# Altium PCB PCB_CONTROL.PcbDoc (part 3 of 15)
Units mil, origin at the board's own origin, x right, y up, seen from the top; angles counter-clockwise.
Board outline 7360.03 x 4773.15 mil, 2 copper layers (Top Layer, Bottom Layer); 73 components, 135 nets, 396 pads, 106 vias.
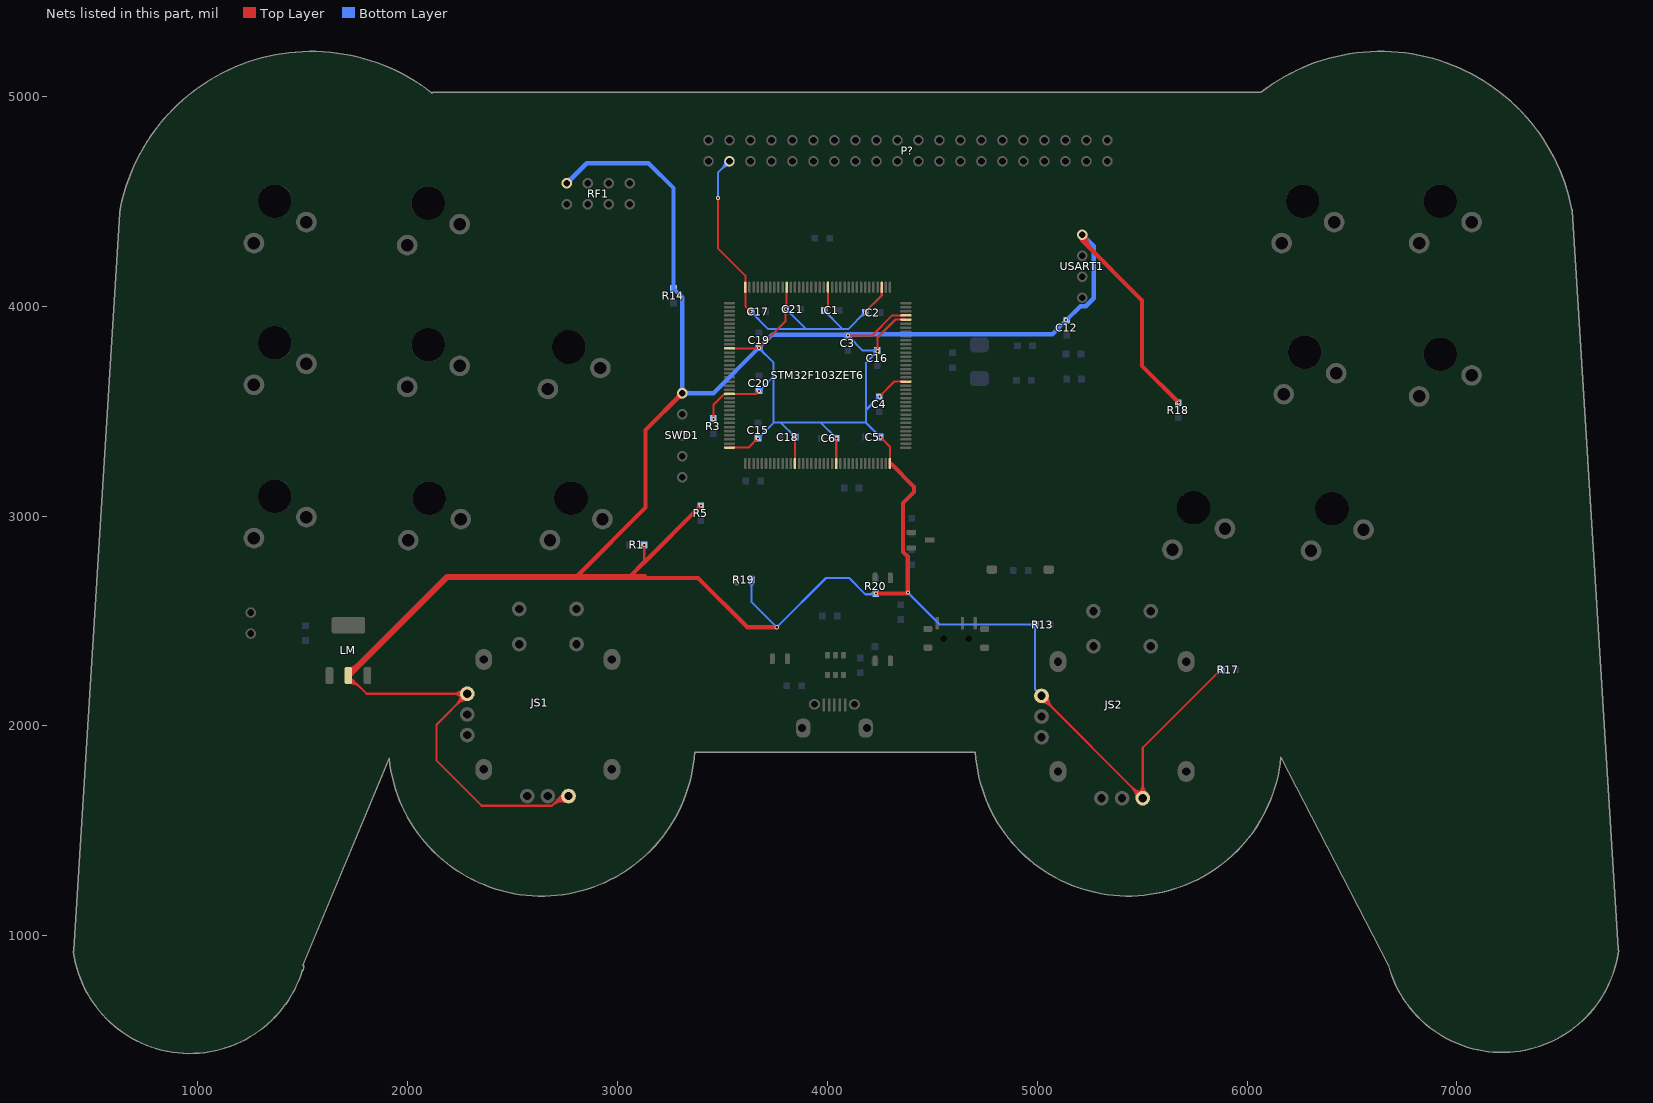
[diagram p3: the nets of this part, all layers, seen from the top]

## Via types
v1: diameter 20, hole 10, Top Layer to Bottom Layer, 104 vias
v2: diameter 30, hole 20, Top Layer to Bottom Layer, 2 vias

## Nets (pads, with @x,y where several pads share a name; then routed paths per layer and width w, separated by ;. In a path a pad name is that pad's centre, name@x,y a point inside that pad or via, vN(x,y) a via of type N, cw(c..) or ccw(c..) an arc to the next point about the centre after c; other vN are vias at no path point) (continued)
3V3: (continued)
  Bottom Layer w10: 4165.34,3955.34 ccw(c4151.69,3969) C2.1@4171,3969 ; C2.1@4170.01,3965.29 cw(c4183.65,3961.64) C2.1@4178,3974.58 ; C2.1@4170.01,3965.29 cw(c4183.65,3961.64) C2.1@4178,3974.58 ; C2.1@4170.01,3965.29 cw(c4183.65,3961.64) C2.1@4178,3974.58 ; C2.1@4170.01,3965.29 cw(c4183.65,3961.64) C2.1@4178,3974.58 ; C2.1@4170.01,3965.29 cw(c4183.65,3961.64) C2.1@4178,3974.58 ; C2.1@4170.01,3965.29 cw(c4183.65,3961.64) C2.1@4178,3974.58 ; C2.1@4170.01,3965.29 cw(c4183.65,3961.64) C2.1@4178,3974.58 ; C2.1@4170.01,3965.29 cw(c4183.65,3961.64) C2.1@4178,3974.58 ; C2.1@4170.01,3965.29 cw(c4183.65,3961.64) C2.1@4178,3974.58 ; C2.1@4170.01,3965.29 cw(c4183.65,3961.64) C2.1@4178,3974.58 ; C2.1@4170.01,3965.29 cw(c4183.65,3961.64) C2.1@4178,3974.58 ; C2.1@4170.01,3965.29 cw(c4183.65,3961.64) C2.1@4178,3974.58 ; C2.1@4170.01,3965.29 cw(c4183.65,3961.64) C2.1@4178,3974.58 ; C2.1@4170.01,3965.29 cw(c4183.65,3961.64) C2.1@4178,3974.58 ; C2.1@4170.01,3965.29 cw(c4183.65,3961.64) C2.1@4178,3974.58 ; C2.1@4170.01,3965.29 cw(c4183.65,3961.64) C2.1@4178,3974.58 ; C2.1@4170.01,3965.29 cw(c4183.65,3961.64) C2.1@4178,3974.58 ; C2.1@4170.01,3965.29 cw(c4183.65,3961.64) C2.1@4178,3974.58 ; C2.1@4170.01,3965.29 cw(c4183.65,3961.64) C2.1@4178,3974.58 ; C2.1@4170.01,3965.29 cw(c4183.65,3961.64) C2.1@4178,3974.58 ; C2.1@4170.01,3965.29 cw(c4183.65,3961.64) C2.1@4178,3974.58 ; C2.1@4170.01,3965.29 cw(c4183.65,3961.64) C2.1@4178,3974.58 ; C2.1@4170.01,3965.29 cw(c4183.65,3961.64) C2.1@4178,3974.58 ; C2.1@4170.01,3965.29 cw(c4183.65,3961.64) C2.1@4178,3974.58 ; C2.1@4170.01,3965.29 cw(c4183.65,3961.64) C2.1@4178,3974.58 ; C2.1@4170.01,3965.29 cw(c4183.65,3961.64) C2.1@4178,3974.58 ; C2.1@4170.01,3965.29 cw(c4183.65,3961.64) C2.1@4178,3974.58 ; C2.1@4170.01,3965.29 cw(c4183.65,3961.64) C2.1@4178,3974.58 ; C2.1@4170.01,3965.29 cw(c4183.65,3961.64) C2.1@4178,3974.58 ; C2.1@4170.01,3965.29 cw(c4183.65,3961.64) C2.1@4178,3974.58 ; C2.1@4170.01,3965.29 cw(c4183.65,3961.64) C2.1@4178,3974.58 ; C2.1@4170.01,3965.29 cw(c4183.65,3961.64) C2.1@4178,3974.58 ; C2.1@4170.01,3965.29 cw(c4183.65,3961.64) C2.1@4178,3974.58 ; C2.1@4170.01,3965.29 cw(c4183.65,3961.64) C2.1@4178,3974.58 ; C2.1@4170.01,3965.29 cw(c4183.65,3961.64) C2.1@4178,3974.58 ; C2.1@4170.01,3965.29 cw(c4183.65,3961.64) C2.1@4178,3974.58 ; C2.1@4170.01,3965.29 cw(c4183.65,3961.64) C2.1@4178,3974.58 ; C2.1@4170.01,3965.29 cw(c4183.65,3961.64) C2.1@4178,3974.58 ; C2.1@4170.01,3965.29 cw(c4183.65,3961.64) C2.1@4178,3974.58 ; C2.1@4170.01,3965.29 cw(c4183.65,3961.64) C2.1@4178,3974.58 ; C2.1@4170.01,3965.29 cw(c4183.65,3961.64) C2.1@4178,3974.58 ; C2.1@4170.01,3965.29 cw(c4183.65,3961.64) C2.1@4178,3974.58 ; C2.1@4170.01,3965.29 cw(c4183.65,3961.64) C2.1@4178,3974.58 ; C2.1@4170.01,3965.29 cw(c4183.65,3961.64) C2.1@4178,3974.58 ; C2.1@4170.01,3965.29 cw(c4183.65,3961.64) C2.1@4178,3974.58 ; C2.1@4170.01,3965.29 cw(c4183.65,3961.64) C2.1@4178,3974.58 ; C2.1@4170.01,3965.29 cw(c4183.65,3961.64) C2.1@4178,3974.58 ; C2.1@4170.01,3965.29 cw(c4183.65,3961.64) C2.1@4178,3974.58 ; C2.1@4170.01,3965.29 cw(c4183.65,3961.64) C2.1@4178,3974.58 ; C2.1@4170.01,3965.29 cw(c4183.65,3961.64) C2.1@4178,3974.58 ; C2.1@4170.01,3965.29 cw(c4183.65,3961.64) C2.1@4178,3974.58 ; C2.1@4170.01,3965.29 cw(c4183.65,3961.64) C2.1@4178,3974.58 ; C2.1@4170.01,3965.29 cw(c4183.65,3961.64) C2.1@4178,3974.58 ; C2.1@4170.01,3965.29 cw(c4183.65,3961.64) C2.1@4178,3974.58 ; C2.1@4170.01,3965.29 cw(c4183.65,3961.64) C2.1@4178,3974.58 ; C2.1@4170.01,3965.29 cw(c4183.65,3961.64) C2.1@4178,3974.58 ; C2.1@4170.01,3965.29 cw(c4183.65,3961.64) C2.1@4178,3974.58 ; C2.1@4170.01,3965.29 cw(c4183.65,3961.64) C2.1@4178,3974.58 ; C2.1@4170.01,3965.29 cw(c4183.65,3961.64) C2.1@4178,3974.58 ; C2.1@4170.01,3965.29 cw(c4183.65,3961.64) C2.1@4178,3974.58 ; C2.1@4170.01,3965.29 cw(c4183.65,3961.64) C2.1@4178,3974.58 ; C2.1@4170.01,3965.29 cw(c4183.65,3961.64) C2.1@4178,3974.58 ; C2.1@4170.01,3965.29 cw(c4183.65,3961.64) C2.1@4178,3974.58 ; C2.1@4170.01,3965.29 cw(c4183.65,3961.64) C2.1@4178,3974.58 ; C2.1@4170.01,3965.29 cw(c4183.65,3961.64) C2.1@4178,3974.58 ; C2.1@4170.01,3965.29 cw(c4183.65,3961.64) C2.1@4178,3974.58 ; C2.1@4170.01,3965.29 cw(c4183.65,3961.64) C2.1@4178,3974.58 ; C2.1@4170.01,3965.29 cw(c4183.65,3961.64) C2.1@4178,3974.58 ; C2.1@4170.01,3965.29 cw(c4183.65,3961.64) C2.1@4178,3974.58 ; C2.1@4170.01,3965.29 cw(c4183.65,3961.64) C2.1@4178,3974.58 ; C2.1@4170.01,3965.29 cw(c4183.65,3961.64) C2.1@4178,3974.58 ; C2.1@4170.01,3965.29 cw(c4183.65,3961.64) C2.1@4178,3974.58 ; C2.1@4170.01,3965.29 cw(c4183.65,3961.64) C2.1@4178,3974.58 ; C2.1@4170.01,3965.29 cw(c4183.65,3961.64) C2.1@4178,3974.58 ; C2.1@4170.01,3965.29 cw(c4183.65,3961.64) C2.1@4178,3974.58 ; C2.1@4170.01,3965.29 cw(c4183.65,3961.64) C2.1@4178,3974.58 ; C2.1@4170.01,3965.29 cw(c4183.65,3961.64) C2.1@4178,3974.58 ; C2.1@4170.01,3965.29 cw(c4183.65,3961.64) C2.1@4178,3974.58 ; C2.1@4170.01,3965.29 cw(c4183.65,3961.64) C2.1@4178,3974.58 ; C2.1@4170.01,3965.29 cw(c4183.65,3961.64) C2.1@4178,3974.58 ; C2.1@4170.01,3965.29 cw(c4183.65,3961.64) C2.1@4178,3974.58 ; C2.1@4170.01,3965.29 cw(c4183.65,3961.64) C2.1@4178,3974.58 ; C2.1@4170.01,3965.29 cw(c4183.65,3961.64) C2.1@4178,3974.58 ; C2.1@4170.01,3965.29 cw(c4183.65,3961.64) C2.1@4178,3974.58 ; C2.1@4170.01,3965.29 cw(c4183.65,3961.64) C2.1@4178,3974.58 ; C2.1@4170.01,3965.29 cw(c4183.65,3961.64) C2.1@4178,3974.58 ; C2.1@4170.01,3965.29 cw(c4183.65,3961.64) C2.1@4178,3974.58 ; C2.1@4170.01,3965.29 cw(c4183.65,3961.64) C2.1@4178,3974.58 ; C2.1@4170.01,3965.29 cw(c4183.65,3961.64) C2.1@4178,3974.58 ; C2.1@4170.01,3965.29 cw(c4183.65,3961.64) C2.1@4178,3974.58 ; C2.1@4170.01,3965.29 cw(c4183.65,3961.64) C2.1@4178,3974.58 ; C2.1@4170.01,3965.29 cw(c4183.65,3961.64) C2.1@4178,3974.58 ; C2.1@4170.01,3965.29 cw(c4183.65,3961.64) C2.1@4178,3974.58 ; C2.1@4170.01,3965.29 cw(c4183.65,3961.64) C2.1@4178,3974.58 ; C2.1@4170.01,3965.29 cw(c4183.65,3961.64) C2.1@4178,3974.58 ; C2.1@4170.01,3965.29 cw(c4183.65,3961.64) C2.1@4178,3974.58 ; C2.1@4170.01,3965.29 cw(c4183.65,3961.64) C2.1@4178,3974.58 ; C2.1@4170.01,3965.29 cw(c4183.65,3961.64) C2.1@4178,3974.58 ; C2.1@4170.01,3965.29 cw(c4183.65,3961.64) C2.1@4178,3974.58 ; C2.1@4170.01,3965.29 cw(c4183.65,3961.64) C2.1@4178,3974.58 ; C2.1@4170.01,3965.29 cw(c4183.65,3961.64) C2.1@4178,3974.58 ; C2.1@4170.01,3965.29 cw(c4183.65,3961.64) C2.1@4178,3974.58 ; C2.1@4170.01,3965.29 cw(c4183.65,3961.64) C2.1@4178,3974.58 ; C2.1@4170.01,3965.29 cw(c4183.65,3961.64) C2.1@4178,3974.58 ; C2.1@4170.01,3965.29 cw(c4183.65,3961.64) C2.1@4178,3974.58 ; C2.1@4170.01,3965.29 cw(c4183.65,3961.64) C2.1@4178,3974.58 ; C2.1@4170.01,3965.29 cw(c4183.65,3961.64) C2.1@4178,3974.58 ; C2.1@4170.01,3965.29 cw(c4183.65,3961.64) C2.1@4178,3974.58 ; C2.1@4170.01,3965.29 cw(c4183.65,3961.64) C2.1@4178,3974.58 ; C2.1@4170.01,3965.29 cw(c4183.65,3961.64) C2.1@4178,3974.58 ; C2.1@4170.01,3965.29 cw(c4183.65,3961.64) C2.1@4178,3974.58 ; C2.1@4170.01,3965.29 cw(c4183.65,3961.64) C2.1@4178,3974.58 ; C2.1@4170.01,3965.29 cw(c4183.65,3961.64) C2.1@4178,3974.58 ; C2.1@4170.01,3965.29 cw(c4183.65,3961.64) C2.1@4178,3974.58 ; C2.1@4170.01,3965.29 cw(c4183.65,3961.64) C2.1@4178,3974.58 ; C2.1@4170.01,3965.29 cw(c4183.65,3961.64) C2.1@4178,3974.58 ; C2.1@4170.01,3965.29 cw(c4183.65,3961.64) C2.1@4178,3974.58 ; C2.1@4170.01,3965.29 cw(c4183.65,3961.64) C2.1@4178,3974.58 ; C2.1@4170.01,3965.29 cw(c4183.65,3961.64) C2.1@4178,3974.58 ; C2.1@4170.01,3965.29 cw(c4183.65,3961.64) C2.1@4178,3974.58 ; C2.1@4170.01,3965.29 cw(c4183.65,3961.64) C2.1@4178,3974.58 ; C2.1@4170.01,3965.29 cw(c4183.65,3961.64) C2.1@4178,3974.58 ; C2.1@4170.01,3965.29 cw(c4183.65,3961.64) C2.1@4178,3974.58 ; C2.1@4170.01,3965.29 cw(c4183.65,3961.64) C2.1@4178,3974.58 ; C2.1@4170.01,3965.29 cw(c4183.65,3961.64) C2.1@4178,3974.58 ; C2.1@4170.01,3965.29 cw(c4183.65,3961.64) C2.1@4178,3974.58 ; C2.1@4170.01,3965.29 cw(c4183.65,3961.64) C2.1@4178,3974.58 ; C2.1@4170.01,3965.29 cw(c4183.65,3961.64) C2.1@4178,3974.58 ; C2.1@4170.01,3965.29 cw(c4183.65,3961.64) C2.1@4178,3974.58 ; C2.1@4170.01,3965.29 cw(c4183.65,3961.64) C2.1@4178,3974.58 ; C2.1@4170.01,3965.29 cw(c4183.65,3961.64) C2.1@4178,3974.58 ; C2.1@4170.01,3965.29 cw(c4183.65,3961.64) C2.1@4178,3974.58 ; C2.1@4170.01,3965.29 cw(c4183.65,3961.64) C2.1@4178,3974.58 ; C2.1@4170.01,3965.29 cw(c4183.65,3961.64) C2.1@4178,3974.58 ; C2.1@4170.01,3965.29 cw(c4183.65,3961.64) C2.1@4178,3974.58 ; C2.1@4170.01,3965.29 cw(c4183.65,3961.64) C2.1@4178,3974.58 ; C2.1@4170.01,3965.29 cw(c4183.65,3961.64) C2.1@4178,3974.58 ; C2.1@4170.01,3965.29 cw(c4183.65,3961.64) C2.1@4178,3974.58 ; C2.1@4170.01,3965.29 cw(c4183.65,3961.64) C2.1@4178,3974.58 ; C2.1@4170.01,3965.29 cw(c4183.65,3961.64) C2.1@4178,3974.58 ; C2.1@4170.01,3965.29 cw(c4183.65,3961.64) C2.1@4178,3974.58 ; C2.1@4170.01,3965.29 cw(c4183.65,3961.64) C2.1@4178,3974.58 ; C2.1@4170.01,3965.29 cw(c4183.65,3961.64) C2.1@4178,3974.58 ; C2.1@4170.01,3965.29 cw(c4183.65,3961.64) C2.1@4178,3974.58 ; C2.1@4171.46,3961.46 cw(c4180,3952.93) C2.1@4180,3965 ; C2.1@4171.46,3961.46 ccw(c4162.93,3970) C2.1@4175,3970 ; C2.1@4171.46,3961.46 cw(c4180,3952.93) C2.1@4180,3965 ; C2.1@4171.46,3961.46 ccw(c4162.93,3970) C2.1@4175,3970 ; C2.1@4171.46,3961.46 cw(c4180,3952.93) C2.1@4180,3965 ; C2.1@4171.46,3961.46 ccw(c4162.93,3970) C2.1@4175,3970 ; C2.1@4171.46,3961.46 cw(c4180,3952.93) C2.1@4180,3965 ; C2.1@4171.46,3961.46 ccw(c4162.93,3970) C2.1@4175,3970 ; C2.1@4171.46,3961.46 ccw(c4162.93,3970) C2.1@4175,3970 ; C2.1@4171.46,3961.46 cw(c4180,3952.93) C2.1@4180,3965 ; C2.1@4171.46,3961.46 ccw(c4162.93,3970) C2.1@4175,3970 ; C2.1@4171.46,3961.46 cw(c4180,3952.93) C2.1@4180,3965 ; C2.1@4171.46,3961.46 ccw(c4162.93,3970) C2.1@4175,3970 ; C2.1@4171.46,3961.46 cw(c4180,3952.93) C2.1@4180,3965 ; C2.1@4171.46,3961.46 ccw(c4162.93,3970) C2.1@4175,3970 ; C2.1@4171.46,3961.46 cw(c4180,3952.93) C2.1@4180,3965 ; C2.1@4171.46,3961.46 ccw(c4162.93,3970) C2.1@4175,3970 ; C2.1@4171.46,3961.46 cw(c4180,3952.93) C2.1@4180,3965 ; C2.1@4171.46,3961.46 ccw(c4162.93,3970) C2.1@4175,3970 ; C2.1@4171.46,3961.46 cw(c4180,3952.93) C2.1@4180,3965 ; C2.1@4171.46,3961.46 ccw(c4162.93,3970) C2.1@4175,3970 ; C2.1@4171.46,3961.46 cw(c4180,3952.93) C2.1@4180,3965 ; C2.1@4171.46,3961.46 ccw(c4162.93,3970) C2.1@4175,3970 ; C2.1@4171.46,3961.46 cw(c4180,3952.93) C2.1@4180,3965 ; C2.1@4171.46,3961.46 ccw(c4162.93,3970) C2.1@4175,3970 ; C2.1@4171.46,3961.46 cw(c4180,3952.93) C2.1@4180,3965 ; C2.1@4171.46,3961.46 ccw(c4162.93,3970) C2.1@4175,3970 ; C2.1@4171.46,3961.46 cw(c4180,3952.93) C2.1@4180,3965 ; C2.1@4171.46,3961.46 ccw(c4162.93,3970) C2.1@4175,3970 ; C2.1@4171.46,3961.46 cw(c4180,3952.93) C2.1@4180,3965 ; C2.1@4171.46,3961.46 ccw(c4162.93,3970) C2.1@4175,3970 ; C2.1@4171.46,3961.46 cw(c4180,3952.93) C2.1@4180,3965 ; C2.1@4171.46,3961.46 ccw(c4162.93,3970) C2.1@4175,3970 ; C2.1@4171.46,3961.46 cw(c4180,3952.93) C2.1@4180,3965 ; C2.1@4171.46,3961.46 ccw(c4162.93,3970) C2.1@4175,3970 ; C2.1@4171.46,3961.46 cw(c4180,3952.93) C2.1@4180,3965 ; C2.1@4171.46,3961.46 ccw(c4162.93,3970) C2.1@4175,3970 ; C2.1@4171.46,3961.46 cw(c4180,3952.93) C2.1@4180,3965 ; C2.1@4171.46,3961.46 ccw(c4162.93,3970) C2.1@4175,3970 ; C2.1@4171.46,3961.46 cw(c4180,3952.93) C2.1@4180,3965 ; C2.1@4171.46,3961.46 ccw(c4162.93,3970) C2.1@4175,3970 ; C2.1@4171.46,3961.46 cw(c4180,3952.93) C2.1@4180,3965 ; C2.1@4171.46,3961.46 ccw(c4162.93,3970) C2.1@4175,3970 ; C2.1@4171.46,3961.46 cw(c4180,3952.93) C2.1@4180,3965 ; C2.1@4171.46,3961.46 ccw(c4162.93,3970) C2.1@4175,3970 ; C2.1@4171.46,3961.46 cw(c4180,3952.93) C2.1@4180,3965 ; C2.1@4171.46,3961.46 ccw(c4162.93,3970) C2.1@4175,3970 ; C2.1@4171.46,3961.46 cw(c4180,3952.93) C2.1@4180,3965 ; C2.1@4171.46,3961.46 ccw(c4162.93,3970) C2.1@4175,3970 ; C2.1@4171.46,3961.46 cw(c4180,3952.93) C2.1@4180,3965 ; C2.1@4171.46,3961.46 ccw(c4162.93,3970) C2.1@4175,3970 ; C2.1@4171.46,3961.46 cw(c4180,3952.93) C2.1@4180,3965 ; C2.1@4171.46,3961.46 ccw(c4162.93,3970) C2.1@4175,3970 ; C2.1@4171.46,3961.46 cw(c4180,3952.93) C2.1@4180,3965 ; C2.1@4171.46,3961.46 ccw(c4162.93,3970) C2.1@4175,3970 ; C2.1@4171.46,3961.46 cw(c4180,3952.93) C2.1@4180,3965 ; C2.1@4171.46,3961.46 ccw(c4162.93,3970) C2.1@4175,3970 ; C2.1@4171.46,3961.46 cw(c4180,3952.93) C2.1@4180,3965 ; C2.1@4171.46,3961.46 ccw(c4162.93,3970) C2.1@4175,3970 ; C2.1@4171.46,3961.46 cw(c4180,3952.93) C2.1@4180,3965 ; C2.1@4171.46,3961.46 ccw(c4162.93,3970) C2.1@4175,3970 ; C2.1@4171.46,3961.46 cw(c4180,3952.93) C2.1@4180,3965 ; C2.1@4171.46,3961.46 ccw(c4162.93,3970) C2.1@4175,3970 ; C2.1@4171.46,3961.46 cw(c4180,3952.93) C2.1@4180,3965 ; C2.1@4171.46,3961.46 ccw(c4162.93,3970) C2.1@4175,3970 ; C2.1@4171.46,3961.46 cw(c4180,3952.93) C2.1@4180,3965 ; C2.1@4171.46,3961.46 ccw(c4162.93,3970) C2.1@4175,3970 ; C2.1@4171.46,3961.46 cw(c4180,3952.93) C2.1@4180,3965 ; C2.1@4171.46,3961.46 ccw(c4162.93,3970) C2.1@4175,3970 ; C2.1@4171.46,3961.46 cw(c4180,3952.93) C2.1@4180,3965 ; C2.1@4171.46,3961.46 ccw(c4162.93,3970) C2.1@4175,3970 ; C2.1@4171.46,3961.46 cw(c4180,3952.93) C2.1@4180,3965 ; C2.1@4175,3959.49 ccw(c4167.48,3964.12) C2.1@4175.47,3967.87 ; C2.1@4175,3959.49 ccw(c4167.48,3964.12) C2.1@4175.47,3967.87 ; C2.1@4175,3959.49 ccw(c4167.48,3964.12) C2.1@4175.47,3967.87 ; C2.1@4175,3959.49 ccw(c4167.48,3964.12) C2.1@4175.47,3967.87 ; C2.1@4175,3959.49 ccw(c4167.48,3964.12) C2.1@4175.47,3967.87 ; C2.1@4175,3959.49 ccw(c4167.48,3964.12) C2.1@4175.47,3967.87 ; C2.1@4175,3959.49 ccw(c4167.48,3964.12) C2.1@4175.47,3967.87 ; C2.1@4175,3959.49 ccw(c4167.48,3964.12) C2.1@4175.47,3967.87 ; C2.1@4175,3959.49 ccw(c4167.48,3964.12) C2.1@4175.47,3967.87 ; C2.1@4175,3959.49 ccw(c4167.48,3964.12) C2.1@4175.47,3967.87 ; C2.1@4175,3959.49 ccw(c4167.48,3964.12) C2.1@4175.47,3967.87 ; C2.1@4175,3959.49 ccw(c4167.48,3964.12) C2.1@4175.47,3967.87 ; C2.1@4175,3959.49 ccw(c4167.48,3964.12) C2.1@4175.47,3967.87 ; C2.1@4175,3959.49 ccw(c4167.48,3964.12) C2.1@4175.47,3967.87 ; C2.1@4175,3959.49 ccw(c4167.48,3964.12) C2.1@4175.47,3967.87 ; C2.1@4175,3959.49 ccw(c4167.48,3964.12) C2.1@4175.47,3967.87 ; C2.1@4175,3959.49 ccw(c4167.48,3964.12) C2.1@4175.47,3967.87 ; C2.1@4175,3959.49 ccw(c4167.48,3964.12) C2.1@4175.47,3967.87 ; C2.1@4175,3959.49 ccw(c4167.48,3964.12) C2.1@4175.47,3967.87 ; C2.1@4175,3959.49 ccw(c4167.48,3964.12) C2.1@4175.47,3967.87 ; C2.1@4175,3959.49 ccw(c4167.48,3964.12) C2.1@4175.47,3967.87 ; C2.1@4175,3959.49 ccw(c4167.48,3964.12) C2.1@4175.47,3967.87 ; C2.1@4175,3959.49 ccw(c4167.48,3964.12) C2.1@4175.47,3967.87 ; C2.1@4175,3959.49 ccw(c4167.48,3964.12) C2.1@4175.47,3967.87 ; C2.1@4175,3959.49 ccw(c4167.48,3964.12) C2.1@4175.47,3967.87 ; C2.1@4175,3959.49 ccw(c4167.48,3964.12) C2.1@4175.47,3967.87 ; C2.1@4175,3959.49 ccw(c4167.48,3964.12) C2.1@4175.47,3967.87 ; C2.1@4175,3959.49 ccw(c4167.48,3964.12) C2.1@4175.47,3967.87 ; C2.1@4175,3959.49 ccw(c4167.48,3964.12) C2.1@4175.47,3967.87 ; C2.1@4175,3959.49 ccw(c4167.48,3964.12) C2.1@4175.47,3967.87 ; C2.1@4175,3959.49 ccw(c4167.48,3964.12) C2.1@4175.47,3967.87 ; C2.1@4175,3959.49 ccw(c4167.48,3964.12) C2.1@4175.47,3967.87 ; C2.1@4175,3959.49 ccw(c4167.48,3964.12) C2.1@4175.47,3967.87 ; C2.1@4175,3959.49 ccw(c4167.48,3964.12) C2.1@4175.47,3967.87 ; C2.1@4175,3959.49 ccw(c4167.48,3964.12) C2.1@4175.47,3967.87 ; C2.1@4175,3959.49 ccw(c4167.48,3964.12) C2.1@4175.47,3967.87 ; C2.1@4175,3959.49 ccw(c4167.48,3964.12) C2.1@4175.47,3967.87 ; C2.1@4175,3959.49 ccw(c4167.48,3964.12) C2.1@4175.47,3967.87 ; C2.1@4175,3959.49 ccw(c4167.48,3964.12) C2.1@4175.47,3967.87 ; C2.1@4175,3959.49 ccw(c4167.48,3964.12) C2.1@4175.47,3967.87 ; C2.1@4175,3959.49 ccw(c4167.48,3964.12) C2.1@4175.47,3967.87 ; C2.1@4175,3959.49 ccw(c4167.48,3964.12) C2.1@4175.47,3967.87 ; C2.1@4175,3959.49 ccw(c4167.48,3964.12) C2.1@4175.47,3967.87 ; C2.1@4175,3959.49 ccw(c4167.48,3964.12) C2.1@4175.47,3967.87 ; C2.1@4175,3959.49 ccw(c4167.48,3964.12) C2.1@4175.47,3967.87 ; C2.1@4175,3959.49 ccw(c4167.48,3964.12) C2.1@4175.47,3967.87 ; C2.1@4175,3959.49 ccw(c4167.48,3964.12) C2.1@4175.47,3967.87 ; C2.1@4175,3959.49 ccw(c4167.48,3964.12) C2.1@4175.47,3967.87 ; C2.1@4175,3959.49 ccw(c4167.48,3964.12) C2.1@4175.47,3967.87 ; C2.1@4175,3959.49 ccw(c4167.48,3964.12) C2.1@4175.47,3967.87 ; C2.1@4175,3959.49 ccw(c4167.48,3964.12) C2.1@4175.47,3967.87 ; C2.1@4175,3959.49 ccw(c4167.48,3964.12) C2.1@4175.47,3967.87 ; C2.1@4175,3959.49 ccw(c4167.48,3964.12) C2.1@4175.47,3967.87 ; C2.1@4175,3959.49 ccw(c4167.48,3964.12) C2.1@4175.47,3967.87 ; C2.1@4175,3959.49 ccw(c4167.48,3964.12) C2.1@4175.47,3967.87 ; C2.1@4175,3959.49 ccw(c4167.48,3964.12) C2.1@4175.47,3967.87 ; C2.1@4175,3959.49 ccw(c4167.48,3964.12) C2.1@4175.47,3967.87 ; C2.1@4175,3959.49 ccw(c4167.48,3964.12) C2.1@4175.47,3967.87 ; C2.1@4175,3959.49 ccw(c4167.48,3964.12) C2.1@4175.47,3967.87 ; C2.1@4175,3959.49 ccw(c4167.48,3964.12) C2.1@4175.47,3967.87 ; C2.1@4175,3959.49 ccw(c4167.48,3964.12) C2.1@4175.47,3967.87 ; C2.1@4175,3959.49 ccw(c4167.48,3964.12) C2.1@4175.47,3967.87 ; C2.1@4175,3959.49 ccw(c4167.48,3964.12) C2.1@4175.47,3967.87 ; C2.1@4175,3959.49 ccw(c4167.48,3964.12) C2.1@4175.47,3967.87 ; C2.1@4175,3959.49 ccw(c4167.48,3964.12) C2.1@4175.47,3967.87 ; C2.1@4175,3959.49 ccw(c4167.48,3964.12) C2.1@4175.47,3967.87 ; C2.1@4175,3959.49 ccw(c4167.48,3964.12) C2.1@4175.47,3967.87 ; C2.1@4175,3959.49 ccw(c4167.48,3964.12) C2.1@4175.47,3967.87 ; C2.1@4175,3959.49 ccw(c4167.48,3964.12) C2.1@4175.47,3967.87 ; C2.1@4175,3959.49 ccw(c4167.48,3964.12) C2.1@4175.47,3967.87 ; C2.1@4175,3959.49 ccw(c4167.48,3964.12) C2.1@4175.47,3967.87 ; C2.1@4175,3959.49 ccw(c4167.48,3964.12) C2.1@4175.47,3967.87 ; C2.1@4175,3959.49 ccw(c4167.48,3964.12) C2.1@4175.47,3967.87 ; C2.1@4175,3959.49 ccw(c4167.48,3964.12) C2.1@4175.47,3967.87 ; C2.1@4175,3959.49 ccw(c4167.48,3964.12) C2.1@4175.47,3967.87 ; C2.1@4175,3959.49 ccw(c4167.48,3964.12) C2.1@4175.47,3967.87 ; C2.1@4175,3959.49 ccw(c4167.48,3964.12) C2.1@4175.47,3967.87 ; C2.1@4175,3959.49 ccw(c4167.48,3964.12) C2.1@4175.47,3967.87 ; C2.1@4175,3959.49 ccw(c4167.48,3964.12) C2.1@4175.47,3967.87 ; C2.1@4175,3959.49 ccw(c4167.48,3964.12) C2.1@4175.47,3967.87 ; C2.1@4175,3959.49 ccw(c4167.48,3964.12) C2.1@4175.47,3967.87 ; C2.1@4175,3959.49 ccw(c4167.48,3964.12) C2.1@4175.47,3967.87 ; C2.1@4175,3959.49 ccw(c4167.48,3964.12) C2.1@4175.47,3967.87 ; C2.1@4175,3959.49 ccw(c4167.48,3964.12) C2.1@4175.47,3967.87 ; C2.1@4175,3959.49 ccw(c4167.48,3964.12) C2.1@4175.47,3967.87 ; C2.1@4175,3959.49 ccw(c4167.48,3964.12) C2.1@4175.47,3967.87 ; C2.1@4175,3959.49 ccw(c4167.48,3964.12) C2.1@4175.47,3967.87 ; C2.1@4175,3959.49 ccw(c4167.48,3964.12) C2.1@4175.47,3967.87 ; C2.1@4175,3959.49 ccw(c4167.48,3964.12) C2.1@4175.47,3967.87 ; C2.1@4175,3959.49 ccw(c4167.48,3964.12) C2.1@4175.47,3967.87 ; C2.1@4175,3959.49 ccw(c4167.48,3964.12) C2.1@4175.47,3967.87 ; C2.1@4175,3959.49 ccw(c4167.48,3964.12) C2.1@4175.47,3967.87 ; C2.1@4175,3959.49 ccw(c4167.48,3964.12) C2.1@4175.47,3967.87 ; C2.1@4175,3959.49 ccw(c4167.48,3964.12) C2.1@4175.47,3967.87 ; C2.1@4175,3959.49 ccw(c4167.48,3964.12) C2.1@4175.47,3967.87 ; C2.1@4175,3959.49 ccw(c4167.48,3964.12) C2.1@4175.47,3967.87 ; C2.1@4175,3959.49 ccw(c4167.48,3964.12) C2.1@4175.47,3967.87 ; C2.1@4175,3959.49 ccw(c4167.48,3964.12) C2.1@4175.47,3967.87 ; C2.1@4175,3959.49 ccw(c4167.48,3964.12) C2.1@4175.47,3967.87 ; C2.1@4175,3959.49 ccw(c4167.48,3964.12) C2.1@4175.47,3967.87 ; C2.1@4175,3959.49 ccw(c4167.48,3964.12) C2.1@4175.47,3967.87 ; C2.1@4175,3959.49 ccw(c4167.48,3964.12) C2.1@4175.47,3967.87 ; C2.1@4175,3959.49 ccw(c4167.48,3964.12) C2.1@4175.47,3967.87 ; C2.1@4175,3959.49 ccw(c4167.48,3964.12) C2.1@4175.47,3967.87 ; C2.1@4175,3959.49 ccw(c4167.48,3964.12) C2.1@4175.47,3967.87 ; C2.1@4175,3959.49 ccw(c4167.48,3964.12) C2.1@4175.47,3967.87 ; C2.1@4175,3959.49 ccw(c4167.48,3964.12) C2.1@4175.47,3967.87 ; C2.1@4175,3959.49 ccw(c4167.48,3964.12) C2.1@4175.47,3967.87 ; C2.1@4175,3959.49 ccw(c4167.48,3964.12) C2.1@4175.47,3967.87 ; C2.1@4175,3959.49 ccw(c4167.48,3964.12) C2.1@4175.47,3967.87 ; C2.1@4175,3959.49 ccw(c4167.48,3964.12) C2.1@4175.47,3967.87 ; C2.1@4175,3959.49 ccw(c4167.48,3964.12) C2.1@4175.47,3967.87 ; C2.1@4175,3959.49 ccw(c4167.48,3964.12) C2.1@4175.47,3967.87 ; C2.1@4175,3959.49 ccw(c4167.48,3964.12) C2.1@4175.47,3967.87 ; C2.1@4175,3959.49 ccw(c4167.48,3964.12) C2.1@4175.47,3967.87 ; C2.1@4175,3959.49 ccw(c4167.48,3964.12) C2.1@4175.47,3967.87 ; C2.1@4175,3959.49 ccw(c4167.48,3964.12) C2.1@4175.47,3967.87 ; C2.1@4175,3959.49 ccw(c4167.48,3964.12) C2.1@4175.47,3967.87 ; C2.1@4175,3959.49 ccw(c4167.48,3964.12) C2.1@4175.47,3967.87 ; C2.1@4175,3959.49 ccw(c4167.48,3964.12) C2.1@4175.47,3967.87 ; C2.1@4175,3959.49 ccw(c4167.48,3964.12) C2.1@4175.47,3967.87 ; C2.1@4175,3959.49 ccw(c4167.48,3964.12) C2.1@4175.47,3967.87 ; C2.1@4175,3959.49 ccw(c4167.48,3964.12) C2.1@4175.47,3967.87 ; C2.1@4175,3959.49 ccw(c4167.48,3964.12) C2.1@4175.47,3967.87 ; C2.1@4175,3959.49 ccw(c4167.48,3964.12) C2.1@4175.47,3967.87 ; C2.1@4175,3959.49 ccw(c4167.48,3964.12) C2.1@4175.47,3967.87 ; C2.1@4175,3959.49 ccw(c4167.48,3964.12) C2.1@4175.47,3967.87 ; C2.1@4175,3959.49 ccw(c4167.48,3964.12) C2.1@4175.47,3967.87 ; C2.1@4175,3959.49 ccw(c4167.48,3964.12) C2.1@4175.47,3967.87 ; C2.1@4175,3959.49 ccw(c4167.48,3964.12) C2.1@4175.47,3967.87 ; C2.1@4175,3959.49 ccw(c4167.48,3964.12) C2.1@4175.47,3967.87 ; C2.1@4175,3959.49 ccw(c4167.48,3964.12) C2.1@4175.47,3967.87 ; C2.1@4175,3959.49 ccw(c4167.48,3964.12) C2.1@4175.47,3967.87 ; C2.1@4175,3959.49 ccw(c4167.48,3964.12) C2.1@4175.47,3967.87 ; C2.1@4175,3959.49 ccw(c4167.48,3964.12) C2.1@4175.47,3967.87 ; C2.1@4175,3959.49 ccw(c4167.48,3964.12) C2.1@4175.47,3967.87 ; C2.1@4175,3959.49 ccw(c4167.48,3964.12) C2.1@4175.47,3967.87 ; C2.1@4175,3959.49 ccw(c4167.48,3964.12) C2.1@4175.47,3967.87 ; C2.1@4175,3959.49 ccw(c4167.48,3964.12) C2.1@4175.47,3967.87 ; C2.1@4175,3959.49 ccw(c4167.48,3964.12) C2.1@4175.47,3967.87 ; C2.1@4175,3959.49 ccw(c4167.48,3964.12) C2.1@4175.47,3967.87 ; C2.1@4175,3959.49 ccw(c4167.48,3964.12) C2.1@4175.47,3967.87 ; C2.1@4175,3959.49 ccw(c4167.48,3964.12) C2.1@4175.47,3967.87 ; C2.1@4175,3959.49 ccw(c4167.48,3964.12) C2.1@4175.47,3967.87 ; C2.1@4175,3959.49 ccw(c4167.48,3964.12) C2.1@4175.47,3967.87 ; C2.1@4175,3959.49 ccw(c4167.48,3964.12) C2.1@4175.47,3967.87 ; C2.1@4175,3959.49 ccw(c4167.48,3964.12) C2.1@4175.47,3967.87 ; C2.1@4175,3959.49 ccw(c4167.48,3964.12) C2.1@4175.47,3967.87 ; C2.1@4175,3959.49 ccw(c4167.48,3964.12) C2.1@4175.47,3967.87 ; C2.1@4175,3959.49 ccw(c4167.48,3964.12) C2.1@4175.47,3967.87 ; C2.1@4175,3959.49 ccw(c4167.48,3964.12) C2.1@4175.47,3967.87 ; C2.1@4175,3959.49 ccw(c4167.48,3964.12) C2.1@4175.47,3967.87 ; C2.1@4175,3959.49 ccw(c4167.48,3964.12) C2.1@4175.47,3967.87 ; C2.1@4175,3959.49 ccw(c4167.48,3964.12) C2.1@4175.47,3967.87 ; C2.1@4175,3959.49 ccw(c4167.48,3964.12) C2.1@4175.47,3967.87 ; C2.1@4175,3959.49 ccw(c4167.48,3964.12) C2.1@4175.47,3967.87 ; C2.1@4175,3959.49 ccw(c4167.48,3964.12) C2.1@4175.47,3967.87 ; C2.1@4175,3959.49 ccw(c4167.48,3964.12) C2.1@4175.47,3967.87 ; C2.1@4175,3959.49 ccw(c4167.48,3964.12) C2.1@4175.47,3967.87 ; C2.1@4175,3959.49 ccw(c4167.48,3964.12) C2.1@4175.47,3967.87 ; C2.1@4175,3959.49 ccw(c4167.48,3964.12) C2.1@4175.47,3967.87 ; C2.1@4175,3959.49 ccw(c4167.48,3964.12) C2.1@4175.47,3967.87 ; C2.1@4175,3959.49 ccw(c4167.48,3964.12) C2.1@4175.47,3967.87 ; C2.1@4175,3959.49 ccw(c4167.48,3964.12) C2.1@4175.47,3967.87 ; C2.1@4175,3959.49 ccw(c4167.48,3964.12) C2.1@4175.47,3967.87 ; C2.1@4175,3959.49 ccw(c4167.48,3964.12) C2.1@4175.47,3967.87 ; C2.1@4175,3959.49 ccw(c4167.48,3964.12) C2.1@4175.47,3967.87 ; C2.1@4175,3959.49 ccw(c4167.48,3964.12) C2.1@4175.47,3967.87 ; C2.1@4175,3959.49 ccw(c4167.48,3964.12) C2.1@4175.47,3967.87 ; C2.1@4175,3959.49 ccw(c4167.48,3964.12) C2.1@4175.47,3967.87 ; C2.1@4175,3959.49 ccw(c4167.48,3964.12) C2.1@4175.47,3967.87 ; C2.1@4175,3959.49 ccw(c4167.48,3964.12) C2.1@4175.47,3967.87 ; C2.1@4175,3959.49 ccw(c4167.48,3964.12) C2.1@4175.47,3967.87 ; C2.1@4175,3959.49 ccw(c4167.48,3964.12) C2.1@4175.47,3967.87 ; C2.1@4175,3959.49 ccw(c4167.48,3964.12) C2.1@4175.47,3967.87 ; C2.1@4175,3959.49 ccw(c4167.48,3964.12) C2.1@4175.47,3967.87 ; C2.1@4175,3959.49 ccw(c4167.48,3964.12) C2.1@4175.47,3967.87 ; C2.1@4175,3959.49 ccw(c4167.48,3964.12) C2.1@4175.47,3967.87 ; C2.1@4175,3959.49 ccw(c4167.48,3964.12) C2.1@4175.47,3967.87 ; C2.1@4175,3959.49 ccw(c4167.48,3964.12) C2.1@4175.47,3967.87 ; C2.1@4175,3959.49 ccw(c4167.48,3964.12) C2.1@4175.47,3967.87 ; C2.1@4175,3959.49 ccw(c4167.48,3964.12) C2.1@4175.47,3967.87 ; C2.1@4175,3959.49 ccw(c4167.48,3964.12) C2.1@4175.47,3967.87 ; C2.1@4175,3959.49 ccw(c4167.48,3964.12) C2.1@4175.47,3967.87 ; C2.1@4175,3959.49 ccw(c4167.48,3964.12) C2.1@4175.47,3967.87 ; C2.1@4175,3959.49 ccw(c4167.48,3964.12) C2.1@4175.47,3967.87 ; C2.1@4175,3959.49 ccw(c4167.48,3964.12) C2.1@4175.47,3967.87 ; C2.1@4175,3959.49 ccw(c4167.48,3964.12) C2.1@4175.47,3967.87 ; C2.1@4175,3959.49 ccw(c4167.48,3964.12) C2.1@4175.47,3967.87 ; C2.1@4175,3959.49 ccw(c4167.48,3964.12) C2.1@4175.47,3967.87 ; C2.1@4175,3959.49 ccw(c4167.48,3964.12) C2.1@4175.47,3967.87 ; C2.1@4175,3959.49 ccw(c4167.48,3964.12) C2.1@4175.47,3967.87 ; C2.1@4175,3959.49 ccw(c4167.48,3964.12) C2.1@4175.47,3967.87 ; C2.1@4175,3959.49 ccw(c4167.48,3964.12) C2.1@4175.47,3967.87 ; C2.1@4175,3959.49 ccw(c4167.48,3964.12) C2.1@4175.47,3967.87 ; C2.1@4175,3959.49 ccw(c4167.48,3964.12) C2.1@4175.47,3967.87 ; C2.1@4175,3959.49 ccw(c4167.48,3964.12) C2.1@4175.47,3967.87 ; C2.1@4175,3959.49 ccw(c4167.48,3964.12) C2.1@4175.47,3967.87 ; C2.1@4175,3959.49 ccw(c4167.48,3964.12) C2.1@4175.47,3967.87 ; C2.1@4175,3959.49 ccw(c4167.48,3964.12) C2.1@4175.47,3967.87 ; C2.1@4175,3959.49 ccw(c4167.48,3964.12) C2.1@4175.47,3967.87 ; C2.1@4175,3959.49 ccw(c4167.48,3964.12) C2.1@4175.47,3967.87 ; C2.1@4175,3959.49 ccw(c4167.48,3964.12) C2.1@4175.47,3967.87 ; C2.1@4175,3959.49 ccw(c4167.48,3964.12) C2.1@4175.47,3967.87 ; C2.1@4175,3959.49 ccw(c4167.48,3964.12) C2.1@4175.47,3967.87 ; C2.1@4175,3959.49 ccw(c4167.48,3964.12) C2.1@4175.47,3967.87 ; C2.1@4175,3959.49 ccw(c4167.48,3964.12) C2.1@4175.47,3967.87 ; C2.1@4175,3959.49 ccw(c4167.48,3964.12) C2.1@4175.47,3967.87 ; C2.1@4175,3959.49 ccw(c4167.48,3964.12) C2.1@4175.47,3967.87 ; C2.1@4175,3959.49 ccw(c4167.48,3964.12) C2.1@4175.47,3967.87 ; C2.1@4175,3959.49 ccw(c4167.48,3964.12) C2.1@4175.47,3967.87 ; C2.1@4175,3959.49 ccw(c4167.48,3964.12) C2.1@4175.47,3967.87 ; C2.1@4175,3959.49 ccw(c4167.48,3964.12) C2.1@4175.47,3967.87 ; C2.1@4175,3959.49 ccw(c4167.48,3964.12) C2.1@4175.47,3967.87 ; C2.1@4175,3959.49 ccw(c4167.48,3964.12) C2.1@4175.47,3967.87 ; C2.1@4175,3959.49 ccw(c4167.48,3964.12) C2.1@4175.47,3967.87 ; C2.1@4175,3959.49 ccw(c4167.48,3964.12) C2.1@4175.47,3967.87 ; C2.1@4175,3959.49 ccw(c4167.48,3964.12) C2.1@4175.47,3967.87 ; C2.1@4175,3959.49 ccw(c4167.48,3964.12) C2.1@4175.47,3967.87 ; C2.1@4175,3959.49 ccw(c4167.48,3964.12) C2.1@4175.47,3967.87 ; C2.1@4175,3959.49 ccw(c4167.48,3964.12) C2.1@4175.47,3967.87 ; C2.1@4175,3959.49 ccw(c4167.48,3964.12) C2.1@4175.47,3967.87 ; C2.1@4175,3959.49 ccw(c4167.48,3964.12) C2.1@4175.47,3967.87 ; C2.1@4175,3959.49 ccw(c4167.48,3964.12) C2.1@4175.47,3967.87 ; C2.1@4175,3959.49 ccw(c4167.48,3964.12) C2.1@4175.47,3967.87 ; C2.1@4175,3959.49 ccw(c4167.48,3964.12) C2.1@4175.47,3967.87 ; C2.1@4175,3959.49 ccw(c4167.48,3964.12) C2.1@4175.47,3967.87 ; C2.1@4175,3959.49 ccw(c4167.48,3964.12) C2.1@4175.47,3967.87 ; C2.1@4175,3959.49 ccw(c4167.48,3964.12) C2.1@4175.47,3967.87 ; C2.1@4175,3959.49 ccw(c4167.48,3964.12) C2.1@4175.47,3967.87 ; C2.1@4175,3959.49 ccw(c4167.48,3964.12) C2.1@4175.47,3967.87 ; C2.1@4175,3959.49 ccw(c4167.48,3964.12) C2.1@4175.47,3967.87 ; C2.1@4175,3959.49 ccw(c4167.48,3964.12) C2.1@4175.47,3967.87 ; C2.1@4175,3959.49 ccw(c4167.48,3964.12) C2.1@4175.47,3967.87 ; C2.1@4175,3959.49 ccw(c4167.48,3964.12) C2.1@4175.47,3967.87 ; C2.1@4175,3959.49 ccw(c4167.48,3964.12) C2.1@4175.47,3967.87 ; C2.1@4175,3959.49 ccw(c4167.48,3964.12) C2.1@4175.47,3967.87 ; C2.1@4175,3959.49 ccw(c4167.48,3964.12) C2.1@4175.47,3967.87 ; C2.1@4175,3959.49 ccw(c4167.48,3964.12) C2.1@4175.47,3967.87 ; C2.1@4175,3959.49 ccw(c4167.48,3964.12) C2.1@4175.47,3967.87 ; C2.1@4175,3959.49 ccw(c4167.48,3964.12) C2.1@4175.47,3967.87 ; C2.1@4175,3959.49 ccw(c4167.48,3964.12) C2.1@4175.47,3967.87 ; C2.1@4175,3959.49 ccw(c4167.48,3964.12) C2.1@4175.47,3967.87 ; C2.1@4175,3959.49 ccw(c4167.48,3964.12) C2.1@4175.47,3967.87 ; C2.1@4175,3959.49 ccw(c4167.48,3964.12) C2.1@4175.47,3967.87 ; C2.1@4175,3959.49 ccw(c4167.48,3964.12) C2.1@4175.47,3967.87 ; C2.1@4175,3959.49 ccw(c4167.48,3964.12) C2.1@4175.47,3967.87 ; C2.1@4175,3959.49 ccw(c4167.48,3964.12) C2.1@4175.47,3967.87 ; C2.1@4175,3959.49 ccw(c4167.48,3964.12) C2.1@4175.47,3967.87 ; C2.1@4175,3959.49 ccw(c4167.48,3964.12) C2.1@4175.47,3967.87 ; C2.1@4175,3959.49 ccw(c4167.48,3964.12) C2.1@4175.47,3967.87 ; C2.1@4175,3959.49 ccw(c4167.48,3964.12) C2.1@4175.47,3967.87 ; C2.1@4175,3959.49 ccw(c4167.48,3964.12) C2.1@4175.47,3967.87 ; C2.1@4175,3959.49 ccw(c4167.48,3964.12) C2.1@4175.47,3967.87 ; C2.1@4175,3959.49 ccw(c4167.48,3964.12) C2.1@4175.47,3967.87 ; C2.1@4175,3959.49 ccw(c4167.48,3964.12) C2.1@4175.47,3967.87 ; C2.1@4175,3959.49 ccw(c4167.48,3964.12) C2.1@4175.47,3967.87 ; C2.1@4175,3959.49 ccw(c4167.48,3964.12) C2.1@4175.47,3967.87 ; C2.1@4175,3959.49 ccw(c4167.48,3964.12) C2.1@4175.47,3967.87 ; C2.1@4175,3959.49 ccw(c4167.48,3964.12) C2.1@4175.47,3967.87 ; C2.1@4175,3959.49 ccw(c4167.48,3964.12) C2.1@4175.47,3967.87 ; C2.1@4175,3959.49 ccw(c4167.48,3964.12) C2.1@4175.47,3967.87 ; C2.1@4175,3959.49 ccw(c4167.48,3964.12) C2.1@4175.47,3967.87 ; C2.1@4175,3959.49 ccw(c4167.48,3964.12) C2.1@4175.47,3967.87 ; C2.1@4175,3959.49 ccw(c4167.48,3964.12) C2.1@4175.47,3967.87 ; C2.1@4175,3959.49 ccw(c4167.48,3964.12) C2.1@4175.47,3967.87 ; C2.1@4175,3959.49 ccw(c4167.48,3964.12) C2.1@4175.47,3967.87 ; C2.1@4175,3959.49 ccw(c4167.48,3964.12) C2.1@4175.47,3967.87 ; C2.1@4175,3959.49 ccw(c4167.48,3964.12) C2.1@4175.47,3967.87 ; C2.1@4175,3959.49 ccw(c4167.48,3964.12) C2.1@4175.47,3967.87 ; C2.1@4175,3959.49 ccw(c4167.48,3964.12) C2.1@4175.47,3967.87 ; C2.1@4175,3959.49 ccw(c4167.48,3964.12) C2.1@4175.47,3967.87 ; C2.1@4175,3959.49 ccw(c4167.48,3964.12) C2.1@4175.47,3967.87 ; C2.1@4175,3959.49 ccw(c4167.48,3964.12) C2.1@4175.47,3967.87 ; C2.1@4175,3959.49 ccw(c4167.48,3964.12) C2.1@4175.47,3967.87 ; C2.1@4175,3959.49 ccw(c4167.48,3964.12) C2.1@4175.47,3967.87 ; C2.1@4175,3959.49 ccw(c4167.48,3964.12) C2.1@4175.47,3967.87 ; C2.1@4175,3959.49 ccw(c4167.48,3964.12) C2.1@4175.47,3967.87 ; C2.1@4175,3959.49 ccw(c4167.48,3964.12) C2.1@4175.47,3967.87 ; C2.1@4175,3959.49 ccw(c4167.48,3964.12) C2.1@4175.47,3967.87 ; C2.1@4175,3959.49 ccw(c4167.48,3964.12) C2.1@4175.47,3967.87 ; C2.1@4175,3959.49 ccw(c4167.48,3964.12) C2.1@4175.47,3967.87 ; C2.1@4175,3959.49 ccw(c4167.48,3964.12) C2.1@4175.47,3967.87 ; C2.1@4175,3959.49 ccw(c4167.48,3964.12) C2.1@4175.47,3967.87 ; C2.1@4175,3959.49 ccw(c4167.48,3964.12) C2.1@4175.47,3967.87 ; C2.1@4175,3959.49 ccw(c4167.48,3964.12) C2.1@4175.47,3967.87 ; C2.1@4175,3959.49 ccw(c4167.48,3964.12) C2.1@4175.47,3967.87 ; C2.1@4175,3959.49 ccw(c4167.48,3964.12) C2.1@4175.47,3967.87 ; C2.1@4175,3959.49 ccw(c4167.48,3964.12) C2.1@4175.47,3967.87 ; C2.1@4175,3959.49 ccw(c4167.48,3964.12) C2.1@4175.47,3967.87 ; C2.1@4175,3959.49 ccw(c4167.48,3964.12) C2.1@4175.47,3967.87 ; C2.1@4175,3959.49 ccw(c4167.48,3964.12) C2.1@4175.47,3967.87 ; C2.1@4175,3959.49 ccw(c4167.48,3964.12) C2.1@4175.47,3967.87 ; C2.1@4175,3959.49 ccw(c4167.48,3964.12) C2.1@4175.47,3967.87 ; C2.1@4175,3959.49 ccw(c4167.48,3964.12) C2.1@4175.47,3967.87 ; C2.1@4175,3959.49 ccw(c4167.48,3964.12) C2.1@4175.47,3967.87 ; C2.1@4175,3959.49 ccw(c4167.48,3964.12) C2.1@4175.47,3967.87 ; C2.1@4175,3959.49 ccw(c4167.48,3964.12) C2.1@4175.47,3967.87 ; C2.1@4175,3959.49 ccw(c4167.48,3964.12) C2.1@4175.47,3967.87 ; C2.1@4175,3959.49 ccw(c4167.48,3964.12) C2.1@4175.47,3967.87 ; C2.1@4175,3959.49 ccw(c4167.48,3964.12) C2.1@4175.47,3967.87 ; C2.1@4175,3959.49 ccw(c4167.48,3964.12) C2.1@4175.47,3967.87 ; C2.1@4175,3959.49 ccw(c4167.48,3964.12) C2.1@4175.47,3967.87 ; C2.1@4175,3959.49 ccw(c4167.48,3964.12) C2.1@4175.47,3967.87 ; C2.1@4175,3959.49 ccw(c4167.48,3964.12) C2.1@4175.47,3967.87 ; C2.1@4175,3959.49 ccw(c4167.48,3964.12) C2.1@4175.47,3967.87 ; C2.1@4175,3959.49 ccw(c4167.48,3964.12) C2.1@4175.47,3967.87 ; C2.1@4175,3959.49 ccw(c4167.48,3964.12) C2.1@4175.47,3967.87 ; C2.1@4175,3959.49 ccw(c4167.48,3964.12) C2.1@4175.47,3967.87 ; C2.1@4175,3959.49 ccw(c4167.48,3964.12) C2.1@4175.47,3967.87 ; C2.1@4175,3959.49 ccw(c4167.48,3964.12) C2.1@4175.47,3967.87 ; C2.1@4175,3959.49 ccw(c4167.48,3964.12) C2.1@4175.47,3967.87 ; C2.1@4175,3959.49 ccw(c4167.48,3964.12) C2.1@4175.47,3967.87 ; C2.1@4175,3959.49 ccw(c4167.48,3964.12) C2.1@4175.47,3967.87 ; C2.1@4175,3959.49 ccw(c4167.48,3964.12) C2.1@4175.47,3967.87 ; C2.1@4175,3959.49 ccw(c4167.48,3964.12) C2.1@4175.47,3967.87 ; C2.1@4175,3959.49 ccw(c4167.48,3964.12) C2.1@4175.47,3967.87 ; C2.1@4175,3959.49 ccw(c4167.48,3964.12) C2.1@4175.47,3967.87 ; C2.1@4175,3959.49 ccw(c4167.48,3964.12) C2.1@4175.47,3967.87 ; C2.1@4175,3959.49 ccw(c4167.48,3964.12) C2.1@4175.47,3967.87 ; C2.1@4175,3959.49 ccw(c4167.48,3964.12) C2.1@4175.47,3967.87 ; C2.1@4175,3959.49 ccw(c4167.48,3964.12) C2.1@4175.47,3967.87 ; C2.1@4175,3959.49 ccw(c4167.48,3964.12) C2.1@4175.47,3967.87 ; C2.1@4175,3959.49 ccw(c4167.48,3964.12) C2.1@4175.47,3967.87 ; C2.1@4175,3959.49 ccw(c4167.48,3964.12) C2.1@4175.47,3967.87 ; C2.1@4175,3959.49 ccw(c4167.48,3964.12) C2.1@4175.47,3967.87 ; C2.1@4175,3959.49 ccw(c4167.48,3964.12) C2.1@4175.47,3967.87 ; C2.1@4175,3959.49 ccw(c4167.48,3964.12) C2.1@4175.47,3967.87 ; C2.1@4175,3959.49 ccw(c4167.48,3964.12) C2.1@4175.47,3967.87 ; C2.1@4175,3959.49 ccw(c4167.48,3964.12) C2.1@4175.47,3967.87 ; C2.1@4175,3959.49 ccw(c4167.48,3964.12) C2.1@4175.47,3967.87 ; C2.1@4175,3959.49 ccw(c4167.48,3964.12) C2.1@4175.47,3967.87 ; C2.1@4175,3959.49 ccw(c4167.48,3964.12) C2.1@4175.47,3967.87 ; C2.1@4175,3959.49 ccw(c4167.48,3964.12) C2.1@4175.47,3967.87 ; C2.1@4175,3959.49 ccw(c4167.48,3964.12) C2.1@4175.47,3967.87 ; C2.1@4175,3959.49 ccw(c4167.48,3964.12) C2.1@4175.47,3967.87 ; 4185,3445 4185,3505 ; 4185,3445 v1(4255,3375) ; 4185,3505 v1(4250,3570) ; 4196.91,2627.46 ccw(c4196.91,2666.09) R20.2@4224.22,2638.78 ; 4196.91,2627.46 ccw(c4196.91,2666.09) R20.2@4224.22,2638.78 ; 4196.91,2627.46 ccw(c4196.91,2666.09) R20.2@4224.22,2638.78 ; 4196.91,2627.46 ccw(c4196.91,2666.09) R20.2@4224.22,2638.78 ; 4196.91,2627.46 ccw(c4196.91,2666.09) R20.2@4224.22,2638.78 ; 4196.91,2627.46 ccw(c4196.91,2666.09) R20.2@4224.22,2638.78 ; 4211.39,2627.46 ccw(c4211.39,2651.61) R20.2@4228.46,2634.54 ; 4211.39,2627.46 ccw(c4211.39,2651.61) R20.2@4228.46,2634.54 ; 4211.39,2627.46 ccw(c4211.39,2651.61) R20.2@4228.46,2634.54 ; 4211.39,2627.46 ccw(c4211.39,2651.61) R20.2@4228.46,2634.54 ; 4211.39,2627.46 ccw(c4211.39,2651.61) R20.2@4228.46,2634.54 ; 4211.39,2627.46 ccw(c4211.39,2651.61) R20.2@4228.46,2634.54 ; 4212.22,2631.85 cw(c4218.09,2621.68) R20.2@4227.85,2628.22 ; 4212.22,2631.85 cw(c4218.09,2621.68) R20.2@4227.85,2628.22 ; 4212.22,2631.85 cw(c4218.09,2621.68) R20.2@4227.85,2628.22 ; 4212.22,2631.85 cw(c4218.09,2621.68) R20.2@4227.85,2628.22 ; 4212.22,2631.85 cw(c4218.09,2621.68) R20.2@4227.85,2628.22 ; 4212.22,2631.85 cw(c4218.09,2621.68) R20.2@4227.85,2628.22 ; 4212.22,2631.85 cw(c4218.09,2621.68) R20.2@4227.85,2628.22 ; 4212.22,2631.85 cw(c4218.09,2621.68) R20.2@4227.85,2628.22 ; 4212.22,2631.85 cw(c4218.09,2621.68) R20.2@4227.85,2628.22 ; 4212.22,2631.85 cw(c4218.09,2621.68) R20.2@4227.85,2628.22 ; 4212.22,2631.85 cw(c4218.09,2621.68) R20.2@4227.85,2628.22 ; 4212.22,2631.85 cw(c4218.09,2621.68) R20.2@4227.85,2628.22 ; 4212.22,2631.85 cw(c4218.09,2621.68) R20.2@4227.85,2628.22 ; 4212.22,2631.85 cw(c4218.09,2621.68) R20.2@4227.85,2628.22 ; 4212.22,2631.85 cw(c4218.09,2621.68) R20.2@4227.85,2628.22 ; 4212.22,2631.85 cw(c4218.09,2621.68) R20.2@4227.85,2628.22 ; 4212.22,2631.85 cw(c4218.09,2621.68) R20.2@4227.85,2628.22 ; 4212.22,2631.85 cw(c4218.09,2621.68) R20.2@4227.85,2628.22 ; 4212.22,2631.85 cw(c4218.09,2621.68) R20.2@4227.85,2628.22 ; 4212.22,2631.85 cw(c4218.09,2621.68) R20.2@4227.85,2628.22 ; 4212.22,2631.85 cw(c4218.09,2621.68) R20.2@4227.85,2628.22 ; 4212.44,3788 cw(c4212.44,3761.44) C16.1@4231.22,3780.22 ; 4212.44,3788 ccw(c4212.44,3814.56) C16.1@4231.22,3795.78 ; 4212.44,3788 ccw(c4212.44,3814.56) C16.1@4231.22,3795.78 ; 4212.44,3788 cw(c4212.44,3761.44) C16.1@4231.22,3780.22 ; 4212.44,3788 ccw(c4212.44,3814.56) C16.1@4231.22,3795.78 ; 4212.44,3788 cw(c4212.44,3761.44) C16.1@4231.22,3780.22 ; 4212.44,3788 ccw(c4212.44,3814.56) C16.1@4231.22,3795.78 ; 4212.44,3788 cw(c4212.44,3761.44) C16.1@4231.22,3780.22 ; 4213.98,2627.46 cw(c4213.98,2612.98) R20.2@4224.22,2623.22 ; 4213.98,2627.46 cw(c4213.98,2612.98) R20.2@4224.22,2623.22 ; 4213.98,2627.46 cw(c4213.98,2612.98) R20.2@4224.22,2623.22 ; 4213.98,2627.46 cw(c4213.98,2612.98) R20.2@4224.22,2623.22 ; 4213.98,2627.46 cw(c4213.98,2612.98) R20.2@4224.22,2623.22 ; 4213.98,2627.46 cw(c4213.98,2612.98) R20.2@4224.22,2623.22 ; 4217.39,3762.39 ccw(c4191.79,3788) C16.1@4228,3788 ; 4217.39,3762.39 ccw(c4191.79,3788) C16.1@4228,3788 ; 4217.39,3762.39 ccw(c4191.79,3788) C16.1@4228,3788 ; 4217.39,3762.39 ccw(c4191.79,3788) C16.1@4228,3788 ; 4218.79,3538.79 v1(4250,3570) ; 4218.79,3538.79 v1(4250,3570) ; 4218.79,3538.79 v1(4250,3570) ; R20.2@4220.06,2629.68 cw(c4223.09,2624.42) R20.2@4227.98,2628.03 ; R20.2@4220.06,2629.68 cw(c4223.09,2624.42) R20.2@4227.98,2628.03 ; R20.2@4220.06,2629.68 cw(c4223.09,2624.42) R20.2@4227.98,2628.03 ; R20.2@4220.06,2629.68 cw(c4223.09,2624.42) R20.2@4227.98,2628.03 ; R20.2@4220.06,2629.68 cw(c4223.09,2624.42) R20.2@4227.98,2628.03 ; R20.2@4220.06,2629.68 cw(c4223.09,2624.42) R20.2@4227.98,2628.03 ; R20.2@4220.06,2629.68 cw(c4223.09,2624.42) R20.2@4227.98,2628.03 ; R20.2@4220.06,2629.68 cw(c4223.09,2624.42) R20.2@4227.98,2628.03 ; R20.2@4220.06,2629.68 cw(c4223.09,2624.42) R20.2@4227.98,2628.03 ; R20.2@4220.06,2629.68 cw(c4223.09,2624.42) R20.2@4227.98,2628.03 ; R20.2@4220.06,2629.68 cw(c4223.09,2624.42) R20.2@4227.98,2628.03 ; R20.2@4220.06,2629.68 cw(c4223.09,2624.42) R20.2@4227.98,2628.03 ; R20.2@4220.06,2629.68 cw(c4223.09,2624.42) R20.2@4227.98,2628.03 ; R20.2@4220.06,2629.68 cw(c4223.09,2624.42) R20.2@4227.98,2628.03 ; R20.2@4220.06,2629.68 cw(c4223.09,2624.42) R20.2@4227.98,2628.03 ; 4220.69,3788 cw(c4220.69,3765.69) C16.1@4236.46,3781.46 ; 4220.69,3788 cw(c4220.69,3765.69) C16.1@4236.46,3781.46 ; 4220.69,3788 cw(c4220.69,3765.69) C16.1@4236.46,3781.46 ; 4220.69,3788 cw(c4220.69,3765.69) C16.1@4236.46,3781.46 ; R20.2@4221.48,2637.19 cw(c4226.99,2627.64) R20.2@4236.15,2633.78 ; R20.2@4221.48,2637.19 cw(c4226.99,2627.64) R20.2@4236.15,2633.78 ; R20.2@4221.48,2637.19 cw(c4226.99,2627.64) R20.2@4236.15,2633.78 ; R20.2@4221.48,2637.19 cw(c4226.99,2627.64) R20.2@4236.15,2633.78 ; R20.2@4221.48,2637.19 cw(c4226.99,2627.64) R20.2@4236.15,2633.78 ; R20.2@4221.48,2637.19 cw(c4226.99,2627.64) R20.2@4236.15,2633.78 ; R20.2@4221.48,2637.19 cw(c4226.99,2627.64) R20.2@4236.15,2633.78 ; R20.2@4221.48,2637.19 cw(c4226.99,2627.64) R20.2@4236.15,2633.78 ; R20.2@4221.48,2637.19 cw(c4226.99,2627.64) R20.2@4236.15,2633.78 ; R20.2@4221.48,2637.19 cw(c4226.99,2627.64) R20.2@4236.15,2633.78 ; R20.2@4221.48,2637.19 cw(c4226.99,2627.64) R20.2@4236.15,2633.78 ; R20.2@4221.48,2637.19 cw(c4226.99,2627.64) R20.2@4236.15,2633.78 ; R20.2@4221.48,2637.19 cw(c4226.99,2627.64) R20.2@4236.15,2633.78 ; R20.2@4221.48,2637.19 cw(c4226.99,2627.64) R20.2@4236.15,2633.78 ; R20.2@4221.48,2637.19 cw(c4226.99,2627.64) R20.2@4236.15,2633.78 ; R20.2@4221.48,2637.19 cw(c4226.99,2627.64) R20.2@4236.15,2633.78 ; R20.2@4221.48,2637.19 cw(c4226.99,2627.64) R20.2@4236.15,2633.78 ; R20.2@4221.48,2637.19 cw(c4226.99,2627.64) R20.2@4236.15,2633.78 ; R20.2@4221.48,2637.19 cw(c4226.99,2627.64) R20.2@4236.15,2633.78 ; R20.2@4221.48,2637.19 cw(c4226.99,2627.64) R20.2@4236.15,2633.78 ; R20.2@4221.48,2637.19 cw(c4226.99,2627.64) R20.2@4236.15,2633.78 ; 4223.17,3769.98 cw(c4247.02,3763.59) C16.1@4239.31,3787.05 ; 4223.17,3769.98 cw(c4247.02,3763.59) C16.1@4239.31,3787.05 ; 4223.17,3769.98 cw(c4247.02,3763.59) C16.1@4239.31,3787.05 ; 4223.17,3769.98 cw(c4247.02,3763.59) C16.1@4239.31,3787.05 ; 4223.17,3769.98 cw(c4247.02,3763.59) C16.1@4239.31,3787.05 ; 4223.17,3769.98 cw(c4247.02,3763.59) C16.1@4239.31,3787.05 ; C16.1@4223.58,3784.63 ccw(c4228.1,3792.47) C16.1@4235.77,3787.66 ; C16.1@4223.58,3784.63 ccw(c4228.1,3792.47) C16.1@4235.77,3787.66 ; C16.1@4223.58,3784.63 ccw(c4228.1,3792.47) C16.1@4235.77,3787.66 ; C16.1@4223.58,3784.63 ccw(c4228.1,3792.47) C16.1@4235.77,3787.66 ; C16.1@4223.58,3784.63 ccw(c4228.1,3792.47) C16.1@4235.77,3787.66 ; C16.1@4223.58,3784.63 ccw(c4228.1,3792.47) C16.1@4235.77,3787.66 ; C16.1@4223.58,3784.63 ccw(c4228.1,3792.47) C16.1@4235.77,3787.66 ; C16.1@4223.58,3784.63 ccw(c4228.1,3792.47) C16.1@4235.77,3787.66 ; C16.1@4223.58,3784.63 ccw(c4228.1,3792.47) C16.1@4235.77,3787.66 ; C16.1@4223.58,3784.63 ccw(c4228.1,3792.47) C16.1@4235.77,3787.66 ; 4223.79,3406.21 v1(4255,3375) ; 4223.79,3406.21 v1(4255,3375) ; 4223.79,3406.21 v1(4255,3375) ; C16.1@4227.05,3772.05 cw(c4239,3760.1) C16.1@4239,3777 ; C16.1@4227.05,3772.05 cw(c4239,3760.1) C16.1@4239,3777 ; C16.1@4227.05,3772.05 cw(c4239,3760.1) C16.1@4239,3777 ; C16.1@4227.05,3772.05 cw(c4239,3760.1) C16.1@4239,3777 ; 4228.51,3548.51 cw(c4249,3528.03) C4.1@4249,3557 ; 4228.51,3548.51 cw(c4249,3528.03) C4.1@4249,3557 ; 4228.51,3548.51 cw(c4249,3528.03) C4.1@4249,3557 ; 4228.51,3548.51 cw(c4249,3528.03) C4.1@4249,3557 ; 4228.51,3548.51 cw(c4249,3528.03) C4.1@4249,3557 ; 4228.51,3548.51 cw(c4249,3528.03) C4.1@4249,3557 ; 4228.51,3548.51 cw(c4249,3528.03) C4.1@4249,3557 ; 4228.51,3548.51 cw(c4249,3528.03) C4.1@4249,3557 ; 4228.51,3548.51 cw(c4249,3528.03) C4.1@4249,3557 ; 4228.51,3548.51 cw(c4249,3528.03) C4.1@4249,3557 ; 4228.51,3548.51 cw(c4249,3528.03) C4.1@4249,3557 ; 4228.51,3548.51 cw(c4249,3528.03) C4.1@4249,3557 ; 4228.51,3548.51 cw(c4249,3528.03) C4.1@4249,3557 ; 4228.51,3548.51 cw(c4249,3528.03) C4.1@4249,3557 ; 4228.51,3548.51 cw(c4249,3528.03) C4.1@4249,3557 ; 4228.51,3548.51 cw(c4249,3528.03) C4.1@4249,3557 ; 4228.51,3548.51 cw(c4249,3528.03) C4.1@4249,3557 ; 4228.51,3548.51 cw(c4249,3528.03) C4.1@4249,3557 ; 4228.51,3548.51 cw(c4249,3528.03) C4.1@4249,3557 ; 4228.51,3548.51 cw(c4249,3528.03) C4.1@4249,3557 ; 4228.51,3548.51 cw(c4249,3528.03) C4.1@4249,3557 ; 4228.51,3548.51 cw(c4249,3528.03) C4.1@4249,3557 ; 4228.51,3548.51 cw(c4249,3528.03) C4.1@4249,3557 ; 4228.51,3548.51 cw(c4249,3528.03) C4.1@4249,3557 ; 4228.51,3548.51 cw(c4249,3528.03) C4.1@4249,3557 ; 4228.51,3548.51 cw(c4249,3528.03) C4.1@4249,3557 ; 4228.51,3548.51 cw(c4249,3528.03) C4.1@4249,3557 ; 4228.51,3548.51 cw(c4249,3528.03) C4.1@4249,3557 ; 4228.51,3548.51 cw(c4249,3528.03) C4.1@4249,3557 ; 4228.51,3548.51 cw(c4249,3528.03) C4.1@4249,3557 ; 4228.51,3548.51 cw(c4249,3528.03) C4.1@4249,3557 ; 4228.51,3548.51 cw(c4249,3528.03) C4.1@4249,3557 ; C16.1@4228.88,3785.85 ccw(c4231.41,3790.23) C16.1@4235.73,3787.6 ; C16.1@4228.88,3785.85 ccw(c4231.41,3790.23) C16.1@4235.73,3787.6 ; C16.1@4228.88,3785.85 ccw(c4231.41,3790.23) C16.1@4235.73,3787.6 ; C16.1@4228.88,3785.85 ccw(c4231.41,3790.23) C16.1@4235.73,3787.6 ; C16.1@4228.88,3785.85 ccw(c4231.41,3790.23) C16.1@4235.73,3787.6 ; C16.1@4228.88,3785.85 ccw(c4231.41,3790.23) C16.1@4235.73,3787.6 ; C16.1@4229.38,3780.55 cw(c4233.53,3774.21) C16.1@4237.43,3780.71 ; C16.1@4229.38,3780.55 cw(c4233.53,3774.21) C16.1@4237.43,3780.71 ; C16.1@4229.38,3780.55 cw(c4233.53,3774.21) C16.1@4237.43,3780.71 ; C16.1@4229.38,3780.55 cw(c4233.53,3774.21) C16.1@4237.43,3780.71 ; C16.1@4229.38,3780.55 cw(c4233.53,3774.21) C16.1@4237.43,3780.71 ; C16.1@4229.38,3780.55 cw(c4233.53,3774.21) C16.1@4237.43,3780.71 ; C16.1@4229.38,3780.55 cw(c4233.53,3774.21) C16.1@4237.43,3780.71 ; C16.1@4229.38,3780.55 cw(c4233.53,3774.21) C16.1@4237.43,3780.71 ; C16.1@4229.38,3780.55 cw(c4233.53,3774.21) C16.1@4237.43,3780.71 ; C16.1@4229.38,3780.55 cw(c4233.53,3774.21) C16.1@4237.43,3780.71 ; 4230.93,3550.93 ccw(c4213.86,3568) C4.1@4238,3568 ; 4230.93,3550.93 ccw(c4213.86,3568) C4.1@4238,3568 ; 4230.93,3550.93 ccw(c4213.86,3568) C4.1@4238,3568 ; 4230.93,3550.93 ccw(c4213.86,3568) C4.1@4238,3568 ; 4230.93,3550.93 ccw(c4213.86,3568) C4.1@4238,3568 ; 4230.93,3550.93 ccw(c4213.86,3568) C4.1@4238,3568 ; 4230.93,3550.93 ccw(c4213.86,3568) C4.1@4238,3568 ; 4230.93,3550.93 ccw(c4213.86,3568) C4.1@4238,3568 ; 4230.93,3550.93 ccw(c4213.86,3568) C4.1@4238,3568 ; 4230.93,3550.93 ccw(c4213.86,3568) C4.1@4238,3568 ; 4230.93,3550.93 ccw(c4213.86,3568) C4.1@4238,3568 ; 4230.93,3550.93 ccw(c4213.86,3568) C4.1@4238,3568 ; 4230.93,3550.93 ccw(c4213.86,3568) C4.1@4238,3568 ; 4230.93,3550.93 ccw(c4213.86,3568) C4.1@4238,3568 ; 4230.93,3550.93 ccw(c4213.86,3568) C4.1@4238,3568 ; 4230.93,3550.93 ccw(c4213.86,3568) C4.1@4238,3568 ; 4230.93,3550.93 ccw(c4213.86,3568) C4.1@4238,3568 ; 4230.93,3550.93 ccw(c4213.86,3568) C4.1@4238,3568 ; 4230.93,3550.93 ccw(c4213.86,3568) C4.1@4238,3568 ; 4230.93,3550.93 ccw(c4213.86,3568) C4.1@4238,3568 ; 4230.93,3550.93 ccw(c4213.86,3568) C4.1@4238,3568 ; 4230.93,3550.93 ccw(c4213.86,3568) C4.1@4238,3568 ; 4230.93,3550.93 ccw(c4213.86,3568) C4.1@4238,3568 ; 4230.93,3550.93 ccw(c4213.86,3568) C4.1@4238,3568 ; 4230.93,3550.93 ccw(c4213.86,3568) C4.1@4238,3568 ; 4230.93,3550.93 ccw(c4213.86,3568) C4.1@4238,3568 ; 4230.93,3550.93 ccw(c4213.86,3568) C4.1@4238,3568 ; 4230.93,3550.93 ccw(c4213.86,3568) C4.1@4238,3568 ; 4230.93,3550.93 ccw(c4213.86,3568) C4.1@4238,3568 ; 4230.93,3550.93 ccw(c4213.86,3568) C4.1@4238,3568 ; 4230.93,3550.93 ccw(c4213.86,3568) C4.1@4238,3568 ; 4230.93,3550.93 ccw(c4213.86,3568) C4.1@4238,3568 ; C16.1@4231.46,3776.46 cw(c4240,3767.93) C16.1@4240,3780 ; C16.1@4231.46,3776.46 ccw(c4222.93,3785) C16.1@4235,3785 ; C16.1@4231.46,3776.46 ccw(c4222.93,3785) C16.1@4235,3785 ; C16.1@4231.46,3776.46 cw(c4240,3767.93) C16.1@4240,3780 ; C16.1@4231.46,3776.46 ccw(c4222.93,3785) C16.1@4235,3785 ; C16.1@4231.46,3776.46 cw(c4240,3767.93) C16.1@4240,3780 ; C16.1@4231.46,3776.46 ccw(c4222.93,3785) C16.1@4235,3785 ; C16.1@4231.46,3776.46 cw(c4240,3767.93) C16.1@4240,3780 ; 4233.51,3396.49 cw(c4213.03,3376) C5.1@4242,3376 ; 4233.51,3396.49 cw(c4213.03,3376) C5.1@4242,3376 ; 4233.51,3396.49 cw(c4213.03,3376) C5.1@4242,3376 ; 4233.51,3396.49 cw(c4213.03,3376) C5.1@4242,3376 ; 4233.51,3396.49 cw(c4213.03,3376) C5.1@4242,3376 ; 4233.51,3396.49 cw(c4213.03,3376) C5.1@4242,3376 ; 4233.51,3396.49 cw(c4213.03,3376) C5.1@4242,3376 ; 4233.51,3396.49 cw(c4213.03,3376) C5.1@4242,3376 ; 4233.51,3396.49 cw(c4213.03,3376) C5.1@4242,3376 ; 4233.51,3396.49 cw(c4213.03,3376) C5.1@4242,3376 ; 4233.51,3396.49 cw(c4213.03,3376) C5.1@4242,3376 ; 4233.51,3396.49 cw(c4213.03,3376) C5.1@4242,3376 ; 4233.51,3396.49 cw(c4213.03,3376) C5.1@4242,3376 ; 4233.51,3396.49 cw(c4213.03,3376) C5.1@4242,3376 ; 4233.51,3396.49 cw(c4213.03,3376) C5.1@4242,3376 ; 4233.51,3396.49 cw(c4213.03,3376) C5.1@4242,3376 ; 4233.51,3396.49 cw(c4213.03,3376) C5.1@4242,3376 ; 4233.51,3396.49 cw(c4213.03,3376) C5.1@4242,3376 ; 4233.51,3396.49 cw(c4213.03,3376) C5.1@4242,3376 ; 4233.51,3396.49 cw(c4213.03,3376) C5.1@4242,3376 ; 4233.51,3396.49 cw(c4213.03,3376) C5.1@4242,3376 ; 4233.51,3396.49 cw(c4213.03,3376) C5.1@4242,3376 ; 4233.51,3396.49 cw(c4213.03,3376) C5.1@4242,3376 ; 4233.51,3396.49 cw(c4213.03,3376) C5.1@4242,3376 ; 4233.51,3396.49 cw(c4213.03,3376) C5.1@4242,3376 ; 4233.51,3396.49 cw(c4213.03,3376) C5.1@4242,3376 ; 4233.51,3396.49 cw(c4213.03,3376) C5.1@4242,3376 ; 4233.51,3396.49 cw(c4213.03,3376) C5.1@4242,3376 ; 4233.51,3396.49 cw(c4213.03,3376) C5.1@4242,3376 ; 4233.51,3396.49 cw(c4213.03,3376) C5.1@4242,3376 ; 4233.51,3396.49 cw(c4213.03,3376) C5.1@4242,3376 ; 4233.51,3396.49 cw(c4213.03,3376) C5.1@4242,3376